# Allegro board METO_STM_CRY_V0_4.brd
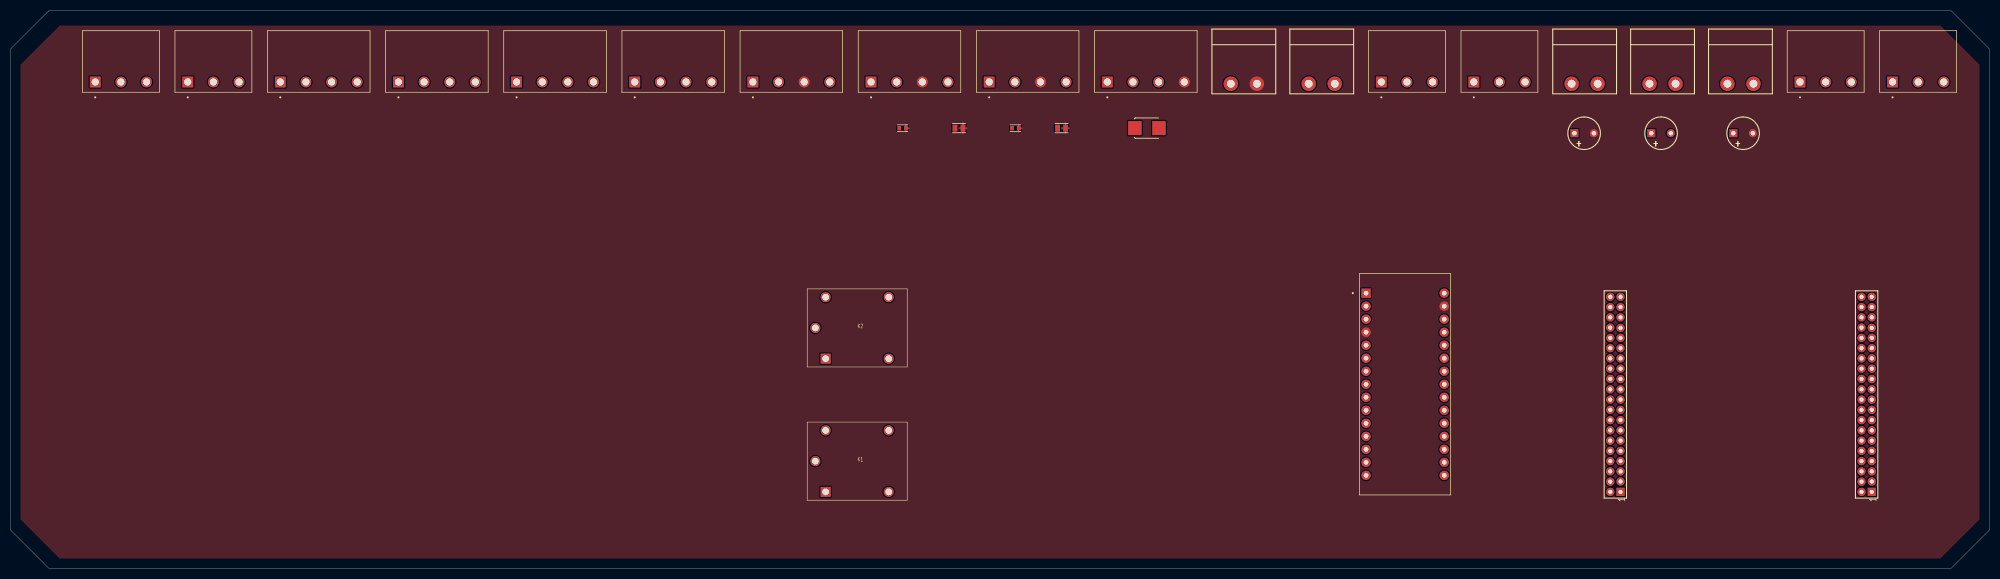
[diagram p0: board, top side]
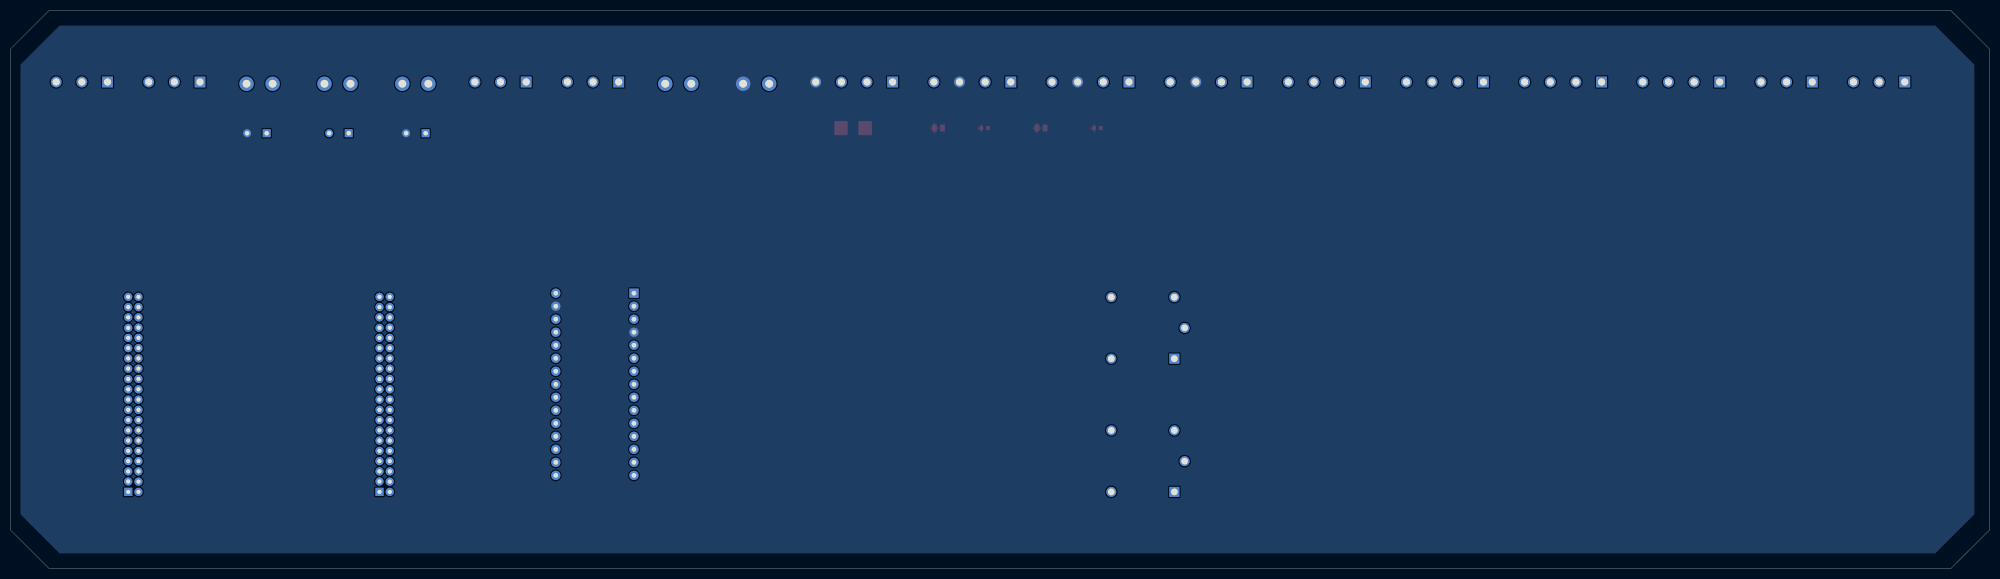
[diagram p1: board, bottom side, seen from below]

Outline 386 x 109 mm; copper layers: TOP, BOTTOM. Coordinates in mm from the lower left corner of the outline.
Outline path: 0,101.38 0,7.62 7.62,0 378.38,0 386,7.62 386,101.38 378.38,109 7.62,109 0,101.38

## Design rules (mm)
constraint set DEFAULT: min track width 0.203

## Placement (name value [footprint] x y rotation side)
C4  CAP POL  [CAPPOL2D250LS150034]  320 85 0 top
C5  CAP POL  [CAPPOL2D250LS150034]  336 85 0 top
C6  CAP POL  [CAPPOL2D250LS150034]  305 85 0 top
C29  10u/6V3/CER  [SMC0805]  185 86 0 top
C30  100n  [SMC0603]  196 86 0 top
C31  10u/6V3/CER  [SMC0805]  205 86 0 top
C32  100n  [SMC0603]  174 86 0 top
D2  MBRA340T3  [SMDO214AA21]  224 86 0 top
J1  CON40  [HEADER_2MM_2X20]  314 15 90 top
J2  CON40  [HEADER_2MM_2X20]  363 15 90 top
J3  282811-4  [TE_282811-4]  60.15 95 0 top
J4  282811-4  [TE_282811-4]  83.19 95 0 top
J5  282811-4  [TE_282811-4]  106.23 95 0 top
J6  282811-4  [TE_282811-4]  129.27 95 0 top
J7  282811-4  [TE_282811-4]  152.31 95 0 top
J8  282811-4  [TE_282811-4]  175.35 95 0 top
J9  282811-4  [TE_282811-4]  198.39 95 0 top
J10  282811-4  [TE_282811-4]  221.43 95 0 top
J11  282811-3  [TE_282811-3]  272.35 95 0 top
J12  282811-3  [TE_282811-3]  39.61 95 0 top
J13  282811-3  [TE_282811-3]  21.57 95 0 top
J14  282811-3  [TE_282811-3]  372.04 95 0 top
J16  CON2  [2LI_KLEMENS_200MILS]  336.8 94.66 0 top
J17  CON2  [2LI_KLEMENS_200MILS]  321.61 94.66 0 top
J18  CON2  [2LI_KLEMENS_200MILS]  351.99 94.66 0 top
J19  CON2  [2LI_KLEMENS_200MILS]  270.34 94.66 0 top
J20  CON2  [2LI_KLEMENS_200MILS]  255.15 94.66 0 top
J21  282811-3  [TE_282811-3]  290.39 95 0 top
J22  282811-3  [TE_282811-3]  354 95 0 top
K1  JQC-3F-_T73_-1Z-12VDC  [JQC3FT731Z12VDC]  159 15 0 top
K2  JQC-3F-_T73_-1Z-12VDC  [JQC3FT731Z12VDC]  159 41 0 top
NOREF  -  []  159 41 90 top
NOREF#2  -  []  171.3 41 90 top
NOREF#3  -  []  157 47 0 top
NOREF#4  -  []  0 71.88 0 top
NOREF#5  -  []  159 15 90 top
NOREF#6  -  []  159 53 0 top
NOREF#7  -  []  157 21 90 top
NOREF#8  -  []  171.3 15 90 top
NOREF#9  -  []  157 21 0 top
NOREF#10  -  []  157 47 90 top
NOREF#11  -  []  159 27 0 top
TB1  ARDUINO_NANO  [SHIELD_ARDUINO_NANO]  272 36 0 top

## Library data of the parts
C4-C6 = CAP POL
C29-C32 = CAPACITOR NON-POL
D2 = 1N5819M/CYL
J1 J2 = CON40
J3-J10 = 282811-4
J11-J14 J21 J22 = 282811-3
J16-J20 = CON2
K1 K2 = JQC-3F-_T73_2
TB1 = ARDUINO_NANO

## Footprints (pads in the part's own frame, mm; a bottom-side part is the same pattern mirrored in y, then rotated)
2LI_KLEMENS_200MILS
  round 2.794 hole 1.524: 1(-17.145,0) 2(-12.065,0)
CAPPOL2D250LS150034
  rect 1.549x1.549 hole 0.864: 1(0,0)
  round 1.549 hole 0.864: 2(3.81,0)
HEADER_2MM_2X20
  rect 1.6x1.6 hole 0.8: 1(0,0)
  round 1.6 hole 0.8: 2(0,2.002) 3(2.032,0) 4(2.002,2.002) 5(4.003,0) 6(4.003,2.002) 7(6.005,0) 8(6.005,2.002) 9(8.006,0) 10(8.006,2.002) 11(10.008,0) 12(10.008,2.002) 13(12.009,0) 14(12.009,2.002) 15(14.011,0) 16(14.011,2.002) 17(16.012,0) 18(16.012,2.002) 19(18.014,0) 20(18.014,2.002) 21(20.015,0) 22(20.015,2.002) 23(22.017,0) 24(22.052,2.002) 25(24.054,0) 26(24.054,2.002) 27(26.055,0) 28(26.055,2.002) 29(28.057,0) 30(28.057,2.002) 31(30.058,0) 32(30.058,2.002) 33(32.004,0) 34(32.06,2.002) 35(34.061,0) 36(34.061,2.002) 37(36.063,0) 38(36.063,2.002) 39(38.064,0) 40(38.064,2.002)
JQC3FT731Z12VDC
  rect 1.95x1.95 hole 1.3: 1(0,0)
  round 1.95 hole 1.3: 2(12.3,0) 3(12.3,12) 4(0,12) 5(-2,6)
SHIELD_ARDUINO_NANO
  rect 1.8x1.8 hole 0.9: 1(-7.62,17.78)
  round 1.8 hole 0.9: 2(-7.62,15.24) 3(-7.62,12.7) 4(-7.62,10.16) 5(-7.62,7.62) 6(-7.62,5.08) 7(-7.62,2.54) 8(-7.62,0) 9(-7.62,-2.54) 10(-7.62,-5.08) 11(-7.62,-7.62) 12(-7.62,-10.16) 13(-7.62,-12.7) 14(-7.62,-15.24) 15(-7.62,-17.78) 16(7.62,-17.78) 17(7.62,-15.24) 18(7.62,-12.7) 19(7.62,-10.16) 20(7.62,-7.62) 21(7.62,-5.08) 22(7.62,-2.54) 23(7.62,0) 24(7.62,2.54) 25(7.62,5.08) 26(7.62,7.62) 27(7.62,10.16) 28(7.62,12.7) 29(7.62,15.24) 30(7.62,17.78)
SMC0603
  rect 0.711x0.838 smd: 1(-0.65,0) 2(0.65,0)
SMC0805
  rect 0.94x1.346 smd: 1(-0.78,0) 2(0.78,0)
SMDO214AA21
  rect 2.616x2.743 smd: 1(0,0) 2(-4.699,0)
TE_282811-3
  rect 2.1x2.1 hole 1.4: 1(-5,0)
  round 2.1 hole 1.4: 2(0,0) 3(5,0)
TE_282811-4
  rect 2.1x2.1 hole 1.4: 1(-7.5,0)
  round 2.1 hole 1.4: 2(-2.5,0) 3(2.5,0) 4(7.5,0)

## Nets
3V3: TB1.17
+5V: TB1.27
GND: C5.2 C6.2 C29.2 C30.2 C31.2 C32.2 J7.3 J8.3 J9.3 J10.4 J20.2 TB1.4 TB1.29
AREF: TB1.18
CON_A_PIN_1: J1.1
CON_A_PIN_2: J1.2
CON_A_PIN_3: J1.3
CON_A_PIN_4: J1.4
CON_A_PIN_5: J1.5
CON_A_PIN_6: J1.6
CON_A_PIN_7: J1.7
CON_A_PIN_8: J1.8
CON_A_PIN_9: J1.9
CON_A_PIN_10: J1.10
CON_A_PIN_11: J1.11
CON_A_PIN_12: J1.12
CON_A_PIN_13: J1.13
CON_A_PIN_14: J1.14
CON_A_PIN_15: J1.15
CON_A_PIN_16: J1.16
CON_A_PIN_17: J1.17
CON_A_PIN_18: J1.18
CON_A_PIN_19: J1.19
CON_A_PIN_20: J1.20
CON_A_PIN_21: J1.21
CON_A_PIN_22: J1.22
CON_A_PIN_23: J1.23
CON_A_PIN_24: J1.24
CON_A_PIN_25: J1.25
CON_A_PIN_26: J1.26
CON_A_PIN_27: J1.27
CON_A_PIN_28: J1.28
CON_A_PIN_29: J1.29
CON_A_PIN_30: J1.30
CON_A_PIN_31: J1.31
CON_A_PIN_32: J1.32
CON_A_PIN_33: J1.33
CON_A_PIN_34: J1.34
CON_A_PIN_35: J1.35
CON_A_PIN_36: J1.36
CON_A_PIN_37: J1.37
CON_A_PIN_38: J1.38
CON_A_PIN_39: J1.39
CON_A_PIN_40: J1.40
CON_B_PIN_1: J2.1
CON_B_PIN_2: J2.2
CON_B_PIN_3: J2.3
CON_B_PIN_4: J2.4
CON_B_PIN_5: J2.5
CON_B_PIN_6: J2.6
CON_B_PIN_7: J2.7
CON_B_PIN_8: J2.8
CON_B_PIN_9: J2.9
CON_B_PIN_10: J2.10
CON_B_PIN_11: J2.11
CON_B_PIN_12: J2.12
CON_B_PIN_13: J2.13
CON_B_PIN_14: J2.14
CON_B_PIN_15: J2.15
CON_B_PIN_16: J2.16
CON_B_PIN_17: J2.17
CON_B_PIN_18: J2.18
CON_B_PIN_19: J2.19
CON_B_PIN_20: J2.20
CON_B_PIN_21: J2.21
CON_B_PIN_22: J2.22
CON_B_PIN_23: J2.23
CON_B_PIN_24: J2.24
CON_B_PIN_25: J2.25
CON_B_PIN_26: J2.26
CON_B_PIN_27: J2.27
CON_B_PIN_28: J2.28
CON_B_PIN_29: J2.29
CON_B_PIN_30: J2.30
CON_B_PIN_31: J2.31
CON_B_PIN_32: J2.32
CON_B_PIN_33: J2.33
CON_B_PIN_34: J2.34
CON_B_PIN_35: J2.35
CON_B_PIN_36: J2.36
CON_B_PIN_37: J2.37
CON_B_PIN_38: J2.38
CON_B_PIN_39: J2.39
CON_B_PIN_40: J2.40
EMSTP_1: C4.1 J16.1
EMSTP_2: C4.2 J16.2
ENCODER_A: C6.1 J10.1
ENCODER_B: C5.1 J10.2
RELAY1_VAC_1: J17.1
RELAY1_VAC_2: J17.2 K1.2
RELAY2_VAC_1: J18.1
RELAY2_VAC_2: J18.2 K2.2
STEP_1_DIR: J7.2
STEP_1_EN: J7.4
STEP_1_STEP: J7.1
STEP_2_DIR: J8.2
STEP_2_EN: J8.4
STEP_2_STEP: J8.1
STEP_3_DIR: J9.2
STEP_3_EN: J9.4
STEP_3_STEP: J9.1
VDC_5V: C29.1 C30.1 D2.1 J10.3 J20.1
VRELAY1_VAC_1: K1.5
VRELAY2_VAC_1: K2.5
N395757: C31.1 C32.1 D2.2(CATHODE) TB1.3 TB1.28 TB1.30(VIN)

Pads without a net: J3 1 2 3 4; J4 1 2 3 4; J5 1 2 3 4; J6 1 2 3 4; J11 1 2 3; J12 1 2 3; J13 1 2 3; J14 1 2 3; J19 1 2; J21 1 2 3; J22 1 2 3; K1 1 3 4; K2 1 3 4; TB1 1 2 5 6 7 8 9 10 11 12 13 14 15 16 19 20 21 22 23 24 25 26

## Routing (per net, layer and track width the routed paths; a pad name or vN(x,y) marks a point on that pad's centre or on a via; arc(x,y) is an arc through that point)
GND: length 11.2
  TOP w0.203: C30.2 197.31,86 ; C30.2 196.65,86.72 ; C30.2 196.65,85.28 ; 205,86 C31.2 ; C31.2 205.78,85.02 ; C31.2 206.55,86 ; C31.2 205.78,86.98 ; C32.2 174.65,86.72 ; C32.2 175.31,86 ; C32.2 174.65,85.28 ; 185.78,85.02 C29.2 ; C29.2 185,86 ; C29.2 186.55,86 ; C29.2 185.78,86.98

## Copper pours and planes (outline as drawn; the poured copper is in the pictures)
GND on TOP: 9.62,2 376.38,2 384,9.62 384,98.38 376.38,106 9.62,106 2,98.38 2,9.62
GND on BOTTOM: 10.62,3 376.38,3 384,10.62 384,98.38 376.38,106 10.62,106 3,98.38 3,10.62
